# EAGLE board Contador Asincronico (EAGLE 7.6.0)

Size 56.82 x 53.33 mm. Coordinates in mm from the lower left corner, seen from the top.
Outline: 0,0 56.82,0 56.82,53.33 0,53.33 0,0
Copper layers (1*16): Top 0.035mm / dielectric 1.5mm / Bottom 0.035mm
Design rules "default": minimum track width 10mil, minimum drill 24mil, track to track 8mil, track to pad 8mil, pad to pad 8mil, via to via 8mil, smd to smd 8mil, copper to edge 40mil, drill to drill 8mil, minimum pad ring 10mil, minimum via ring 8mil, stop-mask expansion 4mil, vias tented up to drill 0mil, thermal gap 10mil

## Footprints (pad centres in the part's own frame; a part is rotated, then mirrored left to right if it is on the bottom)
LED5MM = drill 0.813 octagon: A -1.27,0; K 1.27,0
HDSP-M = drill 0.813 long: 1 -5.08,-7.62; 2 -2.54,-7.62; 3 0,-7.62; 4 2.54,-7.62; 5 5.08,-7.62; 6 5.08,7.62; 7 2.54,7.62; 8 0,7.62; 9 -2.54,7.62; 10 -5.08,7.62
DC-POWER = drill 0.889 pad 2.54 octagon: + 0,2.54; - 0,-2.54
2P-2.54-65/35MIL = drill 0.889 pad 1.651 square: 1 0,1.27 | drill 0.889 pad 1.651: 2 0,-1.27
0207/10 = drill 0.813 octagon: 1 -5.08,0; 2 5.08,0
DIL14 = drill 0.813 long: 1 -7.62,-3.81; 2 -5.08,-3.81; 3 -2.54,-3.81; 4 0,-3.81; 5 2.54,-3.81; 6 5.08,-3.81; 7 7.62,-3.81; 8 7.62,3.81; 9 5.08,3.81; 10 2.54,3.81; 11 0,3.81; 12 -2.54,3.81; 13 -5.08,3.81; 14 -7.62,3.81
DIL16 = drill 0.813 long: 1 -8.89,-3.81; 2 -6.35,-3.81; 3 -3.81,-3.81; 4 -1.27,-3.81; 5 1.27,-3.81; 6 3.81,-3.81; 7 6.35,-3.81; 8 8.89,-3.81; 9 8.89,3.81; 10 6.35,3.81; 11 3.81,3.81; 12 1.27,3.81; 13 -1.27,3.81; 14 -3.81,3.81; 15 -6.35,3.81; 16 -8.89,3.81

## Placement (x,y rotation side)
D2  [LED5MM]  5,187.88 0 top  (outside the outline)
D3  [LED5MM]  5,200.58 0 top  (outside the outline)
D4  [LED5MM]  5,213.28 0 top  (outside the outline)
D5  [LED5MM]  5,225.98 0 top  (outside the outline)
Digit2  [HDSP-M]  5,111.68 0 top  (outside the outline)
Digit3  [HDSP-M]  5,137.08 0 top  (outside the outline)
FUNCCLK  [DC-POWER]  5,22.78 0 top
P1  5V  [2P-2.54-65/35MIL]  5,10.08 0 top
R1  330‎Ω  [0207/10]  5,238.68 0 top  (outside the outline)
R2  330‎Ω  [0207/10]  5,60.88 0 top  (outside the outline)
R3  330‎Ω  [0207/10]  5,149.78 0 top  (outside the outline)
R4  330‎Ω  [0207/10]  5,162.48 0 top  (outside the outline)
R5  330‎Ω  [0207/10]  5,175.18 0 top  (outside the outline)
R6  330‎Ω  [0207/10]  5,251.38 0 top  (outside the outline)
R7  330‎Ω  [0207/10]  5,264.08 0 top  (outside the outline)
R8  330‎Ω  [0207/10]  5,276.78 0 top  (outside the outline)
U1  [DIL14]  5,35.48 0 top
U2  [DIL14]  5,48.18 0 top
U3  [DIL14]  5,73.58 0 top  (outside the outline)
U4  [DIL14]  5,86.28 0 top  (outside the outline)
U6  [DIL16]  5,98.98 0 top  (outside the outline)
U7  [DIL16]  5,124.38 0 top  (outside the outline)

## Library data of the parts
D2-D5 Digit2 Digit3 FUNCCLK P1 R1-R8 U1-U4 U6 U7 = AUTODESK_CIRCUITS_BREADBOARD

## Nets
N$1: U1.8 U1.12 U2.11
N$2: D4.A U2.9 U3.9
N$3: U2.2 U2.6
N$4: FUNCCLK.+ U1.3
N$5: U2.3 U2.8 U2.12
N$6: U1.2 U1.6 U1.11
N$7: U3.1
N$8: U3.2
N$9: U3.3
N$10: U3.5
N$11: U3.11 U4.13
N$12: U3.4
N$13: U3.6
N$14: U3.8 U4.12
N$15: U4.1
N$16: U4.3
N$17: U4.5
N$18: U4.11 U6.7
N$19: U4.4
N$20: U4.2
N$21: U4.6
N$22: U4.8
N$23: U4.9
N$24: U4.10
N$25: U7.1
N$26: U7.7
N$27: U7.2
N$28: U7.6
N$29: D2.A U1.5
N$30: D3.A U1.9 U3.13
N$32: Digit2.1 U6.9
N$33: Digit3.4 U7.11
N$34: Digit3.10 U7.14
N$35: P1.2 U1.1 U1.4 U1.10 U1.13 U1.14 U2.1 U2.4 U2.10 U2.13 U2.14 U3.14 U4.14 U6.3 U6.4 U6.16 U7.3 U7.4 U7.16
N$36: FUNCCLK.- P1.1 R1.1 R2.2 R3.1 R4.2 R5.1 R6.1 R7.1 R8.1 U1.7 U2.7 U3.7 U4.7 U6.1 U6.2 U6.5 U6.6 U6.8 U7.5 U7.8
N$37: Digit3.7 U7.13
N$38: Digit3.1 U7.9
N$39: Digit3.9 U7.15
N$40: Digit3.3 R5.2
N$41: Digit3.8 R4.1
N$42: Digit3.2 U7.10
N$43: Digit3.5
N$44: Digit3.6 U7.12
N$45: Digit2.7 U6.13
N$46: Digit2.4 U6.11
N$47: Digit2.9 U6.15
N$48: Digit2.10 U6.14
N$49: Digit2.3 R3.2
N$50: Digit2.8 R2.1
N$51: Digit2.2 U6.10
N$52: Digit2.5
N$53: Digit2.6 U6.12
N$54: D5.A U2.5 U3.10 U3.12
N$55: D5.K R8.2
N$56: D4.K R7.2
N$57: D3.K R6.2
N$58: D2.K R1.2

## Tracks (layer width: path | path; a pad name or v marks a point on that pad's centre or on a via)
N$1  (2 unrouted)
N$2  (2 unrouted)
N$3  (1 unrouted)
N$4  (1 unrouted)
N$5  (2 unrouted)
N$6  (2 unrouted)
N$11  (1 unrouted)
N$14  (1 unrouted)
N$18  (1 unrouted)
N$29  (1 unrouted)
N$30  (2 unrouted)
N$32  (1 unrouted)
N$33  (1 unrouted)
N$34  (1 unrouted)
N$35  (18 unrouted)
N$36  (20 unrouted)
N$37  (1 unrouted)
N$38  (1 unrouted)
N$39  (1 unrouted)
N$40  (1 unrouted)
N$41  (1 unrouted)
N$42  (1 unrouted)
N$44  (1 unrouted)
N$45  (1 unrouted)
N$46  (1 unrouted)
N$47  (1 unrouted)
N$48  (1 unrouted)
N$49  (1 unrouted)
N$50  (1 unrouted)
N$51  (1 unrouted)
N$53  (1 unrouted)
N$54  (3 unrouted)
N$55  (1 unrouted)
N$56  (1 unrouted)
N$57  (1 unrouted)
N$58  (1 unrouted)